# Allegro board DVM.brd
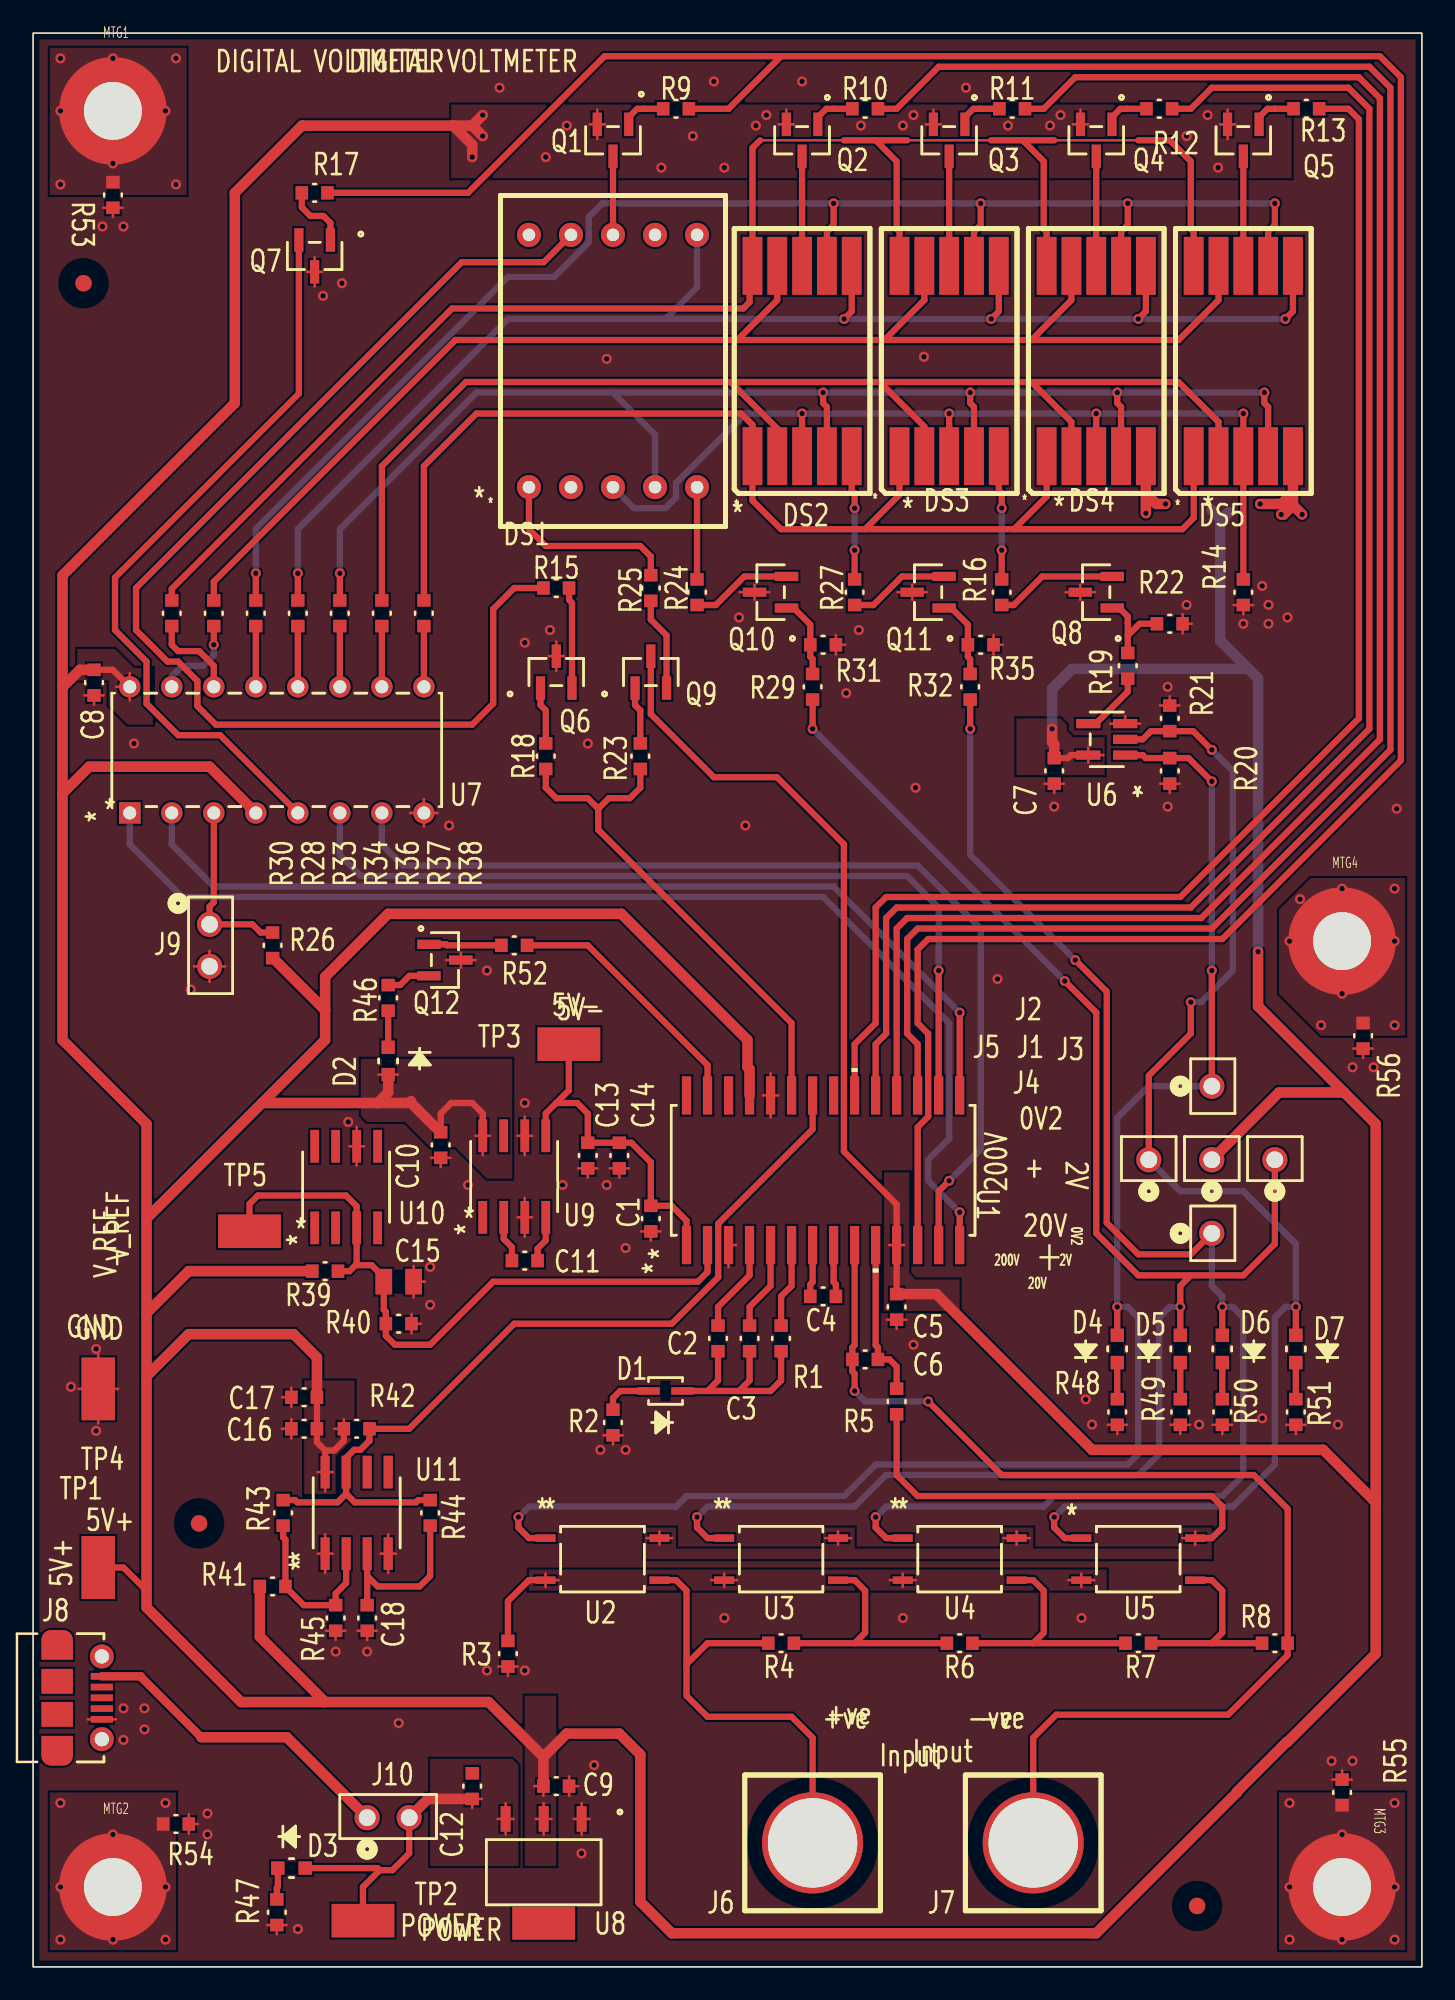
[diagram p0: board, top side]
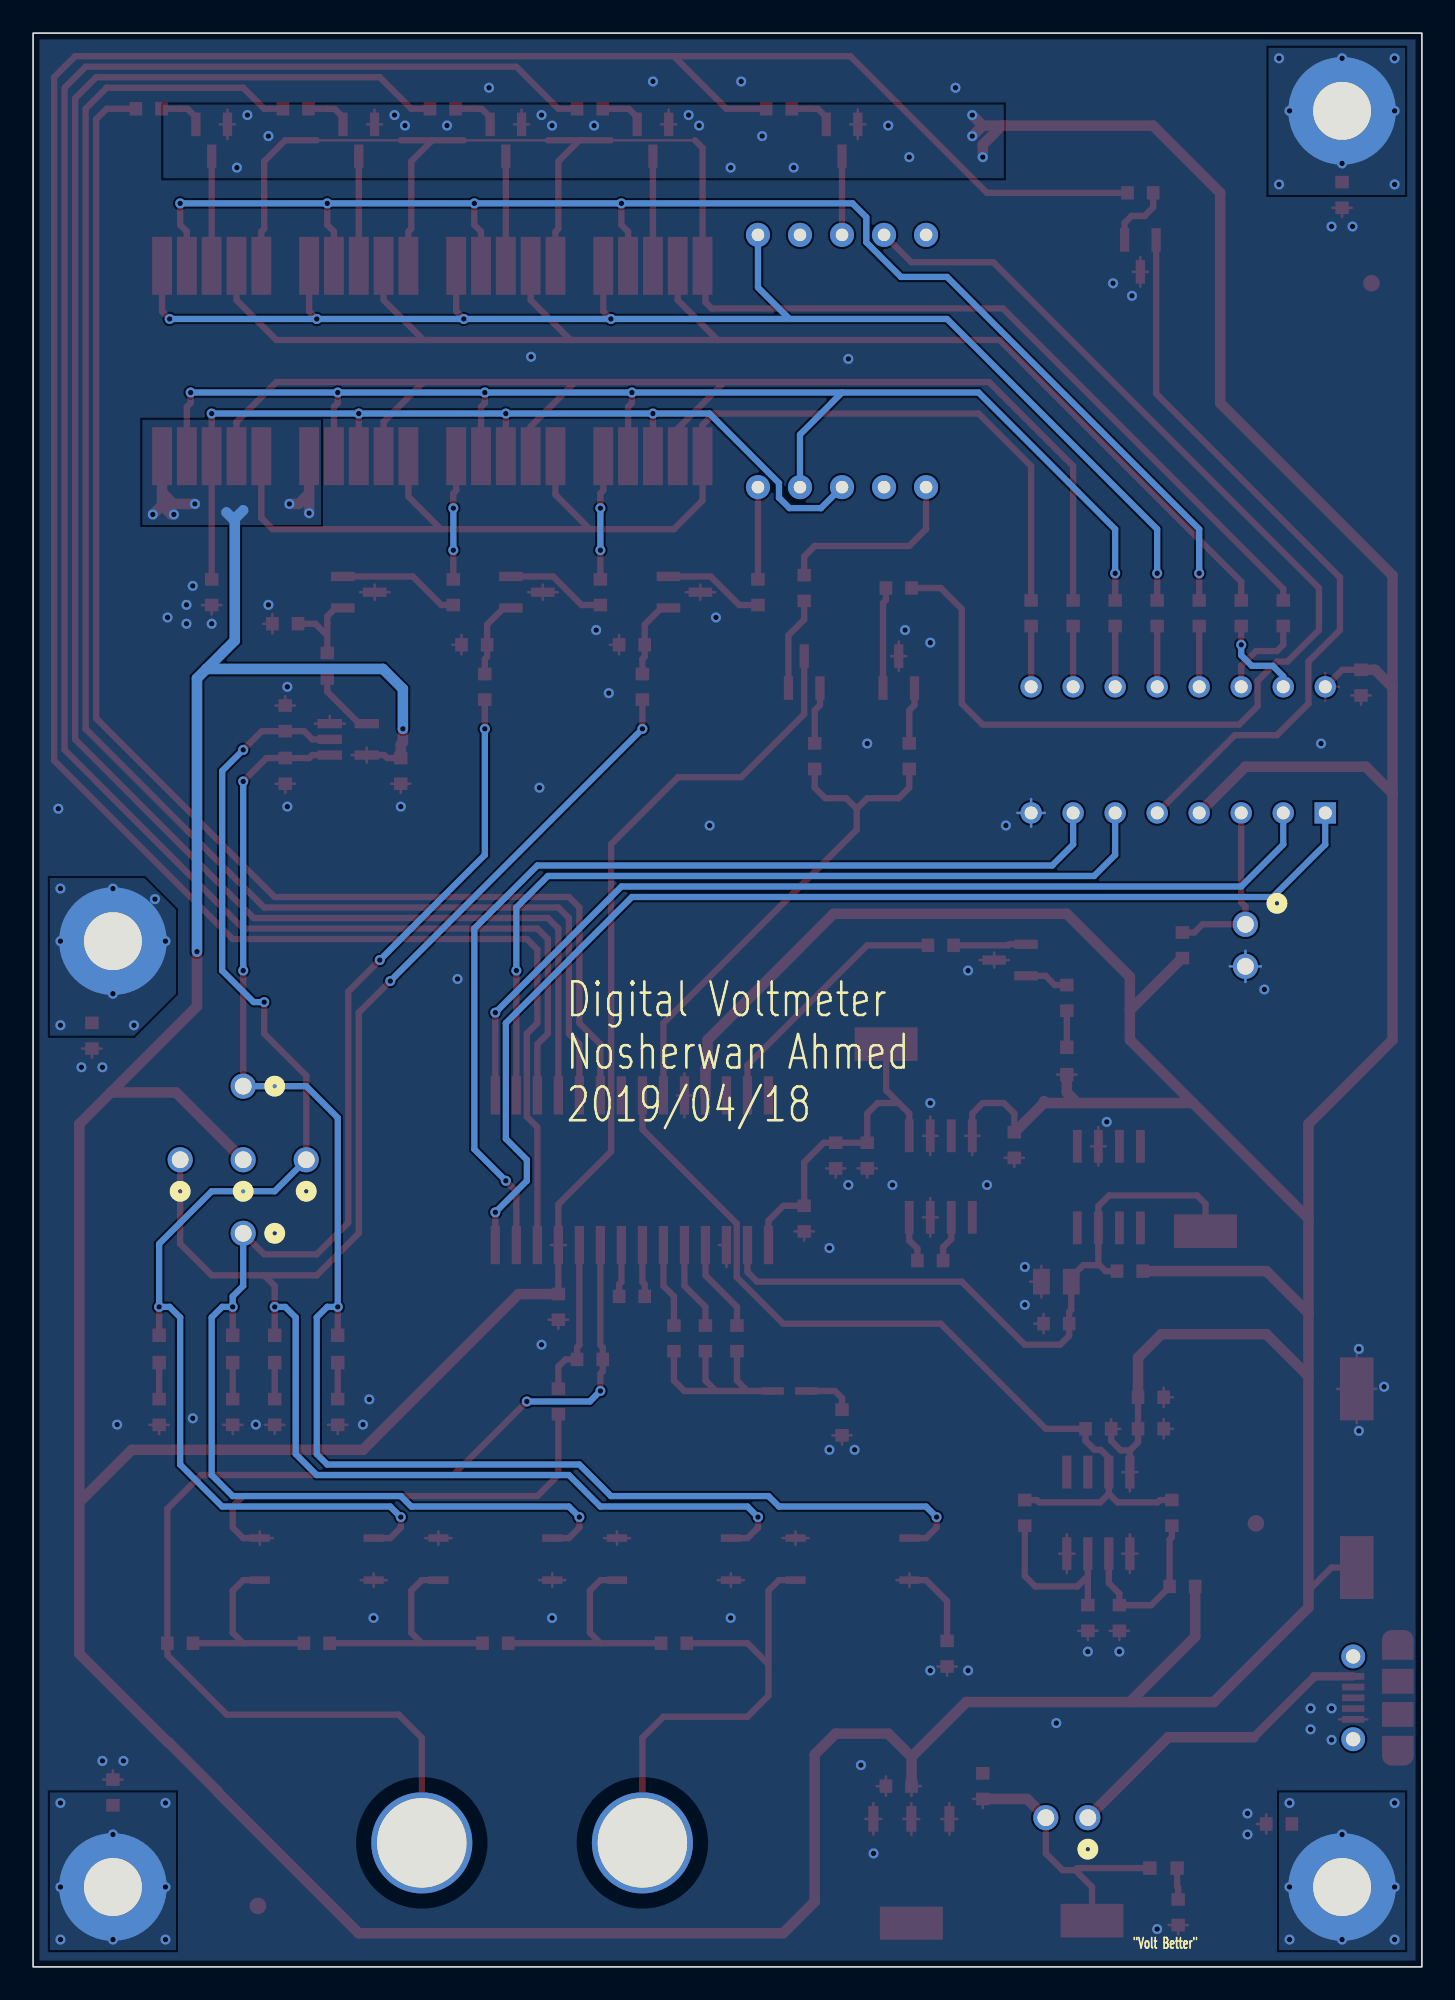
[diagram p1: board, bottom side, seen from below]

Outline 83.95 x 116.84 mm; copper layers: TOP, BOTTOM. Coordinates in mm from the lower left corner of the outline.
Outline path: rectangle 0,0 83.95,116.84

## Placement (name value [footprint] x y rotation side)
C1  10uF  [DVM_RC0603N_R0603]  37.34 45.21 270 top
C2  0.47uF  [DVM_RC0603N_R0603]  41.4 37.97 90 top
C3  1uF  [DVM_RC0603N_R0603]  43.31 37.97 90 top
C4  1uF  [DVM_RC0603N_R0603]  47.75 40.51 180 top
C5  10uF  [DVM_RC0603N_R0603]  52.2 39.88 270 top
C6  0.1uF  [DVM_RC0603N_R0603]  50.29 36.7 180 top
C7  10uF  [DVM_RC0603N_R0603]  61.72 72.26 270 top
C8  10uF  [DVM_RC0603N_R0603]  3.68 77.6 270 top
C9  10uF  [DVM_RC0603N_R0603]  31.62 10.92 0 top
C10  0.1uF  [DVM_RC0603N_R0603]  24.64 49.66 270 top
C11  10uF  [DVM_RC0603N_R0603]  29.72 42.67 0 top
C12  10uF  [DVM_RC0603N_R0603]  26.54 10.92 90 top
C13  0.1uF  [DVM_RC0603N_R0603]  33.53 49.02 90 top
C14  10uF  [DVM_RC0603N_R0603]  35.43 49.02 90 top
C15  4.7uF  [DVM_C0805C-M]  22.1 41.4 0 top
C16  10uF  [DVM_RC0603N_R0603]  16.38 32.51 180 top
C17  0.22uF  [DVM_RC0603N_R0603]  16.38 34.42 180 top
C18  510p  [DVM_RC0603N_R0603]  20.19 21.08 270 top
D1  DIODE  [DVM_SOD323_1N4148BWS]  38.23 34.8 180 top
D2  LED  [DVM_LED_ROHM_SML-D12U1WT86_LED]  21.46 54.74 270 top
D3  LED  [DVM_LED_ROHM_SML-D12U1WT86_LED]  15.62 5.97 0 top
D4  LED  [DVM_LED_ROHM_SML-D12U1WT86_LED]  65.53 37.34 90 top
D5  LED  [DVM_LED_ROHM_SML-D12U1WT86_LED]  69.34 37.34 90 top
D6  LED  [DVM_LED_ROHM_SML-D12U1WT86_LED]  71.88 37.34 90 top
D7  LED  [DVM_LED_ROHM_SML-D12U1WT86_LED]  76.33 37.34 90 top
DS1  LDF-A5616RI  [DVM_DIP_10_SS_OVERFLOW]  35.05 97.03 0 top
DS2  LDS-SMHTA304RISITR  [DVM_SOT_10_SS]  46.48 97.03 0 top
DS3  LDS-SMHTA304RISITR  [DVM_SOT_10_SS]  55.37 97.03 0 top
DS4  LDS-SMHTA304RISITR  [DVM_SOT_10_SS]  64.26 97.03 0 top
DS5  LDS-SMHTA304RISITR  [DVM_SOT_10_SS]  73.15 97.03 0 top
J1  HEADER 1  [DVM_CON1_1X1_TU_TSW_H1]  71.25 48.77 0 top
J2  HEADER 1  [DVM_CON1_1X1_TU_TSW_H1]  71.25 53.21 270 top
J3  HEADER 1  [DVM_CON1_1X1_TU_TSW_H1]  75.06 48.77 0 top
J4  HEADER 1  [DVM_CON1_1X1_TU_TSW_H1]  71.25 44.32 270 top
J5  HEADER 1  [DVM_CON1_1X1_TU_TSW_H1]  67.44 48.77 0 top
J6  CON1  [DVM_BANANA_INPUT]  47.12 7.49 0 top
J7  CON1  [DVM_BANANA_INPUT]  60.45 7.49 0 top
J8  1050170001  [DVM_CON00679_5_USB]  1.65 16.26 270 top
J9  HEADER 2  [DVM_CON2_1X2_TU_TSW_H2]  10.67 61.72 270 top
J10  HEADER 2  [DVM_CON2_1X2_TU_TSW_H2]  21.46 9.02 0 top
MTG1  M3  [M3_KAI]  4.83 112.14 0 top
MTG2  M3  [M3_KAI]  4.83 4.83 0 top
MTG3  M3  [M3_KAI]  79.12 4.83 0 top
MTG4  M3  [M3_KAI]  79.12 61.98 0 top
NOREF  -  [unnamed]  10.03 26.8 0 top
NOREF#2  -  [unnamed]  70.36 3.68 0 top
NOREF#3  -  [unnamed]  3.05 101.73 0 top
Q1  NPN BCE  [DVM_SOT-23_DNBT8105]  35.05 110.36 180 top
Q2  NPN BCE  [DVM_SOT-23_DNBT8105]  46.48 110.36 180 top
Q3  NPN BCE  [DVM_SOT-23_DNBT8105]  55.37 110.36 180 top
Q4  NPN BCE  [DVM_SOT-23_DNBT8105]  64.26 110.36 180 top
Q5  NPN BCE  [DVM_SOT-23_DNBT8105]  73.15 110.36 180 top
Q6  NPN BCE  [DVM_SOT-23_DNBT8105]  31.62 78.23 0 top
Q7  NPN BCE  [DVM_SOT-23_DNBT8105]  17.02 103.38 180 top
Q8  NPN BCE  [DVM_SOT-23_DNBT8105]  64.26 83.06 90 top
Q9  PNP BCE  [DVM_SOT-23_DNBT8105]  37.34 78.23 0 top
Q10  NPN BCE  [DVM_SOT-23_DNBT8105]  44.58 83.06 90 top
Q11  NPN BCE  [DVM_SOT-23_DNBT8105]  54.1 83.06 90 top
Q12  NPN BCE  [DVM_SOT-23_DNBT8105]  24.89 60.83 270 top
R1  10k  [DVM_RC0603N_R0603]  45.21 37.97 90 top
R2  100k  [DVM_RC0603N_R0603]  35.05 32.89 270 top
R3  390  [DVM_RC0603N_R0603]  28.7 18.92 270 top
R4  1.8M  [DVM_RC0603N_R0603]  45.21 19.56 0 top
R5  100k  [DVM_RC0603N_R0603]  52.2 34.16 90 top
R6  180k  [DVM_RC0603N_R0603]  56.01 19.56 0 top
R7  18k  [DVM_RC0603N_R0603]  66.8 19.56 0 top
R8  2k  [DVM_RC0603N_R0603]  75.06 19.56 0 top
R9  2.49k  [DVM_RC0603N_R0603]  38.86 112.27 180 top
R10  1.5k  [DVM_RC0603N_R0603]  50.29 112.27 180 top
R11  1.5k  [DVM_RC0603N_R0603]  59.18 112.27 180 top
R12  1.5k  [DVM_RC0603N_R0603]  68.07 112.27 180 top
R13  1.5k  [DVM_RC0603N_R0603]  76.96 112.27 180 top
R14  150  [DVM_RC0603N_R0603]  73.15 83.06 270 top
R15  150  [DVM_RC0603N_R0603]  31.62 83.31 180 top
R16  150  [DVM_RC0603N_R0603]  58.55 83.06 270 top
R17  47k  [DVM_RC0603N_R0603]  17.02 107.19 180 top
R18  4.7k  [DVM_RC0603N_R0603]  30.99 73.15 90 top
R19  27k  [DVM_RC0603N_R0603]  66.17 78.61 90 top
R20  10k  [DVM_RC0603N_R0603]  68.71 72.26 270 top
R21  10k  [DVM_RC0603N_R0603]  68.71 75.44 90 top
R22  10k  [DVM_RC0603N_R0603]  68.71 81.15 0 top
R23  4.7k  [DVM_RC0603N_R0603]  36.7 73.15 90 top
R24  150  [DVM_RC0603N_R0603]  40.13 83.06 270 top
R25  150  [DVM_RC0603N_R0603]  37.34 83.31 90 top
R26  10k  [DVM_RC0603N_R0603]  14.48 61.72 90 top
R27  150  [DVM_RC0603N_R0603]  49.66 83.06 270 top
R28  150  [DVM_RC0603N_R0603]  10.92 81.79 90 top
R29  27k  [DVM_RC0603N_R0603]  47.12 77.34 90 top
R30  150  [DVM_RC0603N_R0603]  8.38 81.79 90 top
R31  10k  [DVM_RC0603N_R0603]  47.75 79.88 0 top
R32  27k  [DVM_RC0603N_R0603]  56.64 77.34 90 top
R33  150  [DVM_RC0603N_R0603]  13.46 81.79 90 top
R34  150  [DVM_RC0603N_R0603]  16 81.79 90 top
R35  10k  [DVM_RC0603N_R0603]  57.28 79.88 0 top
R36  150  [DVM_RC0603N_R0603]  18.54 81.79 90 top
R37  150  [DVM_RC0603N_R0603]  21.08 81.79 90 top
R38  150  [DVM_RC0603N_R0603]  23.62 81.79 90 top
R39  6.8k  [DVM_RC0603N_R0603]  17.65 42.04 0 top
R40  10k  [DVM_RC0603N_R0603]  22.1 38.86 180 top
R41  16k  [DVM_RC0603N_R0603]  14.48 22.99 0 top
R42  1k  [DVM_RC0603N_R0603]  19.56 32.51 0 top
R43  56k  [DVM_RC0603N_R0603]  15.11 27.43 90 top
R44  30k  [DVM_RC0603N_R0603]  24 27.43 270 top
R45  16k  [DVM_RC0603N_R0603]  18.29 21.08 270 top
R46  140  [DVM_RC0603N_R0603]  21.46 58.55 90 top
R47  140  [DVM_RC0603N_R0603]  14.73 3.3 270 top
R48  140  [DVM_RC0603N_R0603]  65.53 33.53 270 top
R49  140  [DVM_RC0603N_R0603]  69.34 33.53 270 top
R50  140  [DVM_RC0603N_R0603]  71.88 33.53 270 top
R51  140  [DVM_RC0603N_R0603]  76.33 33.53 270 top
R52  39k  [DVM_RC0603N_R0603]  29.08 61.72 180 top
R53  0  [DVM_RC0603N_R0603]  4.83 107.06 270 top
R54  0  [DVM_RC0603N_R0603]  8.64 8.64 0 top
R55  0  [DVM_RC0603N_R0603]  79.12 10.54 90 top
R56  0  [DVM_RC0603N_R0603]  80.39 56.26 270 top
TP1  5V+  [DVM_TP380X203_TP]  3.94 24.13 90 top
TP2  Power_In  [DVM_TP380X203_TP]  19.94 2.79 0 top
TP3  5V-  [DVM_TP380X203_TP]  32.38 55.75 0 top
TP4  GND  [DVM_TP380X203_TP]  3.94 34.92 90 top
TP5  V_REF_1V2  [DVM_TP380X203_TP]  13.08 44.45 0 top
U1  TLC7135  [DVM_DW28_TLC7135]  47.75 48.13 90 top
U2  TLP175A  [DVM_4PINSO6_TLP175A]  34.42 24.64 0 top
U3  TLP175A  [DVM_4PINSO6_TLP175A]  45.21 24.64 0 top
U4  TLP175A  [DVM_4PINSO6_TLP175A]  56.01 24.64 0 top
U5  TLP175A  [DVM_4PINSO6_TLP175A]  66.8 24.64 0 top
U6  SN74LVC1G32DBVR  [DVM_DBV5_SN74]  64.9 74.17 180 top
U7  SN7447  [DVM_N16_SN7447AN]  5.84 69.72 90 top
U8  NCP1117ST50T3G  [DVM_SOT223-3_NCP1117]  30.86 5.71 180 top
U9  MAX1044CSA  [DVM_21-0041B_8_MAX1044]  29.08 47.75 90 top
U10  MAX8069ESA+  [DVM_21-0041B_8_MAX8069]  18.92 47.12 90 top
U11  LM311  [DVM_D8_LM311]  19.56 27.43 90 top

## Library data of the parts
C1-C18 = C
D1 = DIODE
D2-D7 = LED
DS1 = LDF-A5616RI
DS2-DS5 = LDS-SMHTA304RISITR
J1-J5 = HEADER 1
J6 J7 = CON1
J8 = 1050170001_0
J9 J10 = HEADER 2
MTG1-MTG4 = Mounting_Hole
Q1-Q8 Q10-Q12 = NPN BCE
Q9 = PNP BCE
R1-R56 = R
TP1-TP5 = TEST POINT
U1 = TLC7135CDW_1
U2-U5 = TLP175A_0
U6 = SN74LVC1G32DBVR
U7 = SN7447AN
U8 = NCP1117ST50T3G_2
U9 = MAX1044CSA
U10 = MAX8069ESA
U11 = LM311

## Footprints (pads in the part's own frame, mm; a bottom-side part is the same pattern mirrored in y, then rotated)
DVM_4PINSO6_TLP175A
  rect 1.219x0.457 smd: 1(-3.442,1.27) 2(-3.442,-1.27) 3(3.442,-1.27) 4(3.442,1.27)
DVM_21-0041B_8_MAX1044
  rect 1.981x0.533 smd: 1(-2.464,1.905) 2(-2.464,0.635) 3(-2.464,-0.635) 4(-2.464,-1.905) 5(2.464,-1.905) 6(2.464,-0.635) 7(2.464,0.635) 8(2.464,1.905)
DVM_21-0041B_8_MAX8069
  rect 1.981x0.533 smd: 1(-2.464,1.905) 2(-2.464,0.635) 3(-2.464,-0.635) 4(-2.464,-1.905) 5(2.464,-1.905) 6(2.464,-0.635) 7(2.464,0.635) 8(2.464,1.905)
DVM_BANANA_INPUT
  round 6.11 hole 5.41: 1(0,0)
DVM_C0805C-M
  rect 1.016x1.549 smd: 1(-0.902,0) 2(0.902,0)
DVM_CON1_1X1_TU_TSW_H1
  round 1.524 hole 1.016: 1(0,0)
DVM_CON2_1X2_TU_TSW_H2
  round 1.524 hole 1.016: 1(-1.27,0) 2(1.27,0)
DVM_CON00679_5_USB
  rect 0.406x1.346 smd: 1(-1.301,2.504) 2(-0.652,2.504) 3(-0.002,2.504) 4(0.648,2.504) 5(1.298,2.504)
  round 1.448 hole 0.864: 6(-2.502,2.504) 7(2.498,2.504)
  rect 1.499x1.905 smd: 8(-1.002,-0.196) 9(0.998,-0.196)
  oval 1.194x1.905 smd: 10(-3.502,-0.196) 11(3.498,-0.196)
  rect 1.2x1.905 smd: 12(-2.902,-0.196) 13(2.898,-0.196)
DVM_D8_LM311
  rect 1.981x0.559 smd: 1(-2.464,1.905) 2(-2.464,0.635) 3(-2.464,-0.635) 4(-2.464,-1.905) 5(2.464,-1.905) 6(2.464,-0.635) 7(2.464,0.635) 8(2.464,1.905)
DVM_DBV5_SN74
  rect 1.473x0.559 smd: 1(-1.118,0.95) 2(-1.118,0) 3(-1.118,-0.95) 4(1.118,-0.95) 5(1.118,0.95)
DVM_DIP_10_SS_OVERFLOW
  round 1.46 hole 0.76: 1(-5.08,-7.62) 2(-2.54,-7.62) 3(0,-7.62) 4(2.54,-7.62) 5(5.08,-7.62) 6(5.08,7.62) 7(2.54,7.62) 8(0,7.62) 9(-2.54,7.62) 10(-5.08,7.62)
DVM_DW28_TLC7135
  rect 2.311x0.559 smd: 1(-4.521,8.255) 2(-4.521,6.985) 3(-4.521,5.715) 4(-4.521,4.445) 5(-4.521,3.175) 6(-4.521,1.905) 7(-4.521,0.635) 8(-4.521,-0.635) 9(-4.521,-1.905) 10(-4.521,-3.175) 11(-4.521,-4.445) 12(-4.521,-5.715) 13(-4.521,-6.985) 14(-4.521,-8.255) 15(4.521,-8.255) 16(4.521,-6.985) 17(4.521,-5.715) 18(4.521,-4.445) 19(4.521,-3.175) 20(4.521,-1.905) 21(4.521,-0.635) 22(4.521,0.635) 23(4.521,1.905) 24(4.521,3.175) 25(4.521,4.445) 26(4.521,5.715) 27(4.521,6.985) 28(4.521,8.255)
DVM_LED_ROHM_SML-D12U1WT86_LED
  rect 0.813x0.813 smd: 1(-0.826,0) 2(0.826,0)
DVM_N16_SN7447AN
  rect 1.295x1.295 hole 0.787: 1(0,0)
  round 1.295 hole 0.787: 2(0,-2.54) 3(0,-5.08) 4(0,-7.62) 5(0,-10.16) 6(0,-12.7) 7(0,-15.24) 8(0,-17.78) 9(7.62,-17.78) 10(7.62,-15.24) 11(7.62,-12.7) 12(7.62,-10.16) 13(7.62,-7.62) 14(7.62,-5.08) 15(7.62,-2.54) 16(7.62,0)
DVM_RC0603N_R0603
  rect 0.762x0.813 smd: 1(-0.775,0) 2(0.775,0)
DVM_SOD323_1N4148BWS
  rect 1.359x0.457 smd: 1(-1.022,0) 2(1.022,0)
DVM_SOT223-3_NCP1117
  rect 0.61x1.549 smd: 1(-2.299,-3.226) 2(0,-3.226) 3(2.299,-3.226)
  rect 3.8x2 smd: 4(0,3.073)
DVM_SOT-23_DNBT8105
  rect 0.559x1.422 smd: 1(-0.953,-0.965) 2(0.953,-0.965) 3(0,0.965)
DVM_SOT_10_SS
  rect 1.2x3.5 smd: 1(-3,-5.75) 2(-1.5,-5.75) 3(0,-5.75) 4(1.5,-5.75) 5(3,-5.75) 6(3,5.75) 7(1.5,5.75) 8(0,5.75) 9(-1.5,5.75) 10(-3,5.75)
DVM_TP380X203_TP
  rect 3.8x2.03 smd: 1(0,0)
M3_KAI
  round 6.5 hole 3.5: 1(0,0)
unnamed
  round 1 smd: (0,0)

## Nets
5V+: C5.1 C7.1 C8.1 C9.1 C10.1 C16.1 C17.1 D2.2(ANODE) DS4.5(CATHODE_DP) DS5.5(CATHODE_DP) J1.1 Q1.2(C) Q2.2(C) Q3.2(C) Q4.2(C) Q5.2(C) Q9.3(E) R26.1 R39.1 R41.1 R42.1 TP1.1 U1.11(VCC+) U1.25(RUN/*HOLD) U6.5(VCC) U7.4(*BI/*RBO) U7.16(VCC) U8.2(OUT) U9.8(V+) U11.8(V+)
5V-: C1.1 C13.2 C14.2 TP3.1 U1.1(VCC?) U9.5(VOUT)
GND: C1.2 C5.2 C7.2 C8.2 C9.2 C10.2 C12.2 C13.1 C14.1 C15.2 C16.2 C17.2 C18.2 J8.5 J9.2 Q6.3(E) Q7.3(E) Q8.3(E) Q10.3(E) Q11.3(E) Q12.3(E) R2.2 R3.2 R14.2 R20.2 R21.2 R22.2 R31.2 R35.2 R40.1 R45.2 R47.2 R48.2 R49.2 R50.2 R51.2 R53.2 R54.2 R55.2 R56.2 TP4.1 U1.3(ANLG COMMON) U1.24(DGTLGND) U6.3(GND) U7.8(GND) U8.1(GND) U9.3(GND) U9.6(LV) U10.6(ANODE) U11.1(GND) U11.4(V-)
VIN_POS: J6.1 R4.1 U2.3(DRAIN_2)
B1: U1.13(B1) U7.7(A)
B2: U1.14(B2) U7.1(B)
B4: U1.15(B4) U7.2(C)
B8: U1.16(B8) U7.6(D)
COMMON_CATHODE: R3.1 U2.2(CATHODE) U3.2(CATHODE) U4.2(CATHODE) U5.2(CATHODE)
D1: R13.1 U1.20(D1)
D2: R12.1 U1.19(D2)
D3: R11.1 U1.18(D3)
D4: R10.1 U1.17(D4)
D5: R9.1 R17.1 U1.12(D5)
MODE_0V2: D4.2(ANODE) J2.1 R20.1 U2.1(ANODE) U6.1(A)
MODE_2V: D5.2(ANODE) J3.1 R29.1 U3.1(ANODE)
MODE_20V: D6.2(ANODE) J4.1 R32.1 U4.1(ANODE)
MODE_200V: D7.2(ANODE) J5.1 R21.1 U5.1(ANODE) U6.2(B)
OSC_120KHZ: R42.2 R43.2 R44.1 U1.22(CLK) U11.7(OUT)
OVER_RNG: R52.1 U1.27(OVERRANGE)
POL: R18.1 R23.1 U1.23(POLARITY)
POWER_IN: C12.1 D3.2(ANODE) J10.2 TP2.1 U8.3(IN)
SS_A: DS2.7(CATHODE_A) DS3.7(CATHODE_A) DS4.7(CATHODE_A) DS5.7(CATHODE_A) R33.2
SS_B: DS1.6(CATHODE_B) DS2.6(CATHODE_B) DS3.6(CATHODE_B) DS4.6(CATHODE_B) DS5.6(CATHODE_B) R34.2
SS_C: DS1.4(CATHODE_C) DS2.4(CATHODE_C) DS3.4(CATHODE_C) DS4.4(CATHODE_C) DS5.4(CATHODE_C) R36.2
SS_D: DS2.2(CATHODE_D) DS3.2(CATHODE_D) DS4.2(CATHODE_D) DS5.2(CATHODE_D) R37.2
SS_DP3: DS3.5(CATHODE_DP) R16.1
SS_DP4: DS2.5(CATHODE_DP) R27.1
SS_DP5: DS1.5(CATHODE_DP) R24.1
SS_E: DS2.1(CATHODE_E) DS3.1(CATHODE_E) DS4.1(CATHODE_E) DS5.1(CATHODE_E) R38.2
SS_F: DS2.9(CATHODE_F) DS3.9(CATHODE_F) DS4.9(CATHODE_F) DS5.9(CATHODE_F) R28.2
SS_G: DS2.10(CATHODE_G) DS3.10(CATHODE_G) DS4.10(CATHODE_G) DS5.10(CATHODE_G) R30.2
SS_NEG: DS1.1(CATHODE_MINUS) R25.2
SS_POS: DS1.9(CATHODE_PLUS) R15.2
V_NEG: C6.2 J7.1 R8.2 U1.9(IN?)
V_POS: C6.1 R5.2 U1.10(IN+)
V_REF_1V2: C15.1 R39.2 R40.2 TP5.1 U1.2(REF) U10.3(CATHODE)
N00563: C11.1 U9.2(CAP+)
N00567: C11.2 U9.4(CAP-)
N01528: R41.2 R43.1 R45.1 U11.2(+IN)
N01588: C18.1 R44.2 U11.3(-IN)
N03523: R4.2 R6.1 U3.3(DRAIN_2)
N03533: R6.2 R7.1 U4.3(DRAIN_2)
N03577: R7.2 R8.1 U5.3(DRAIN_2)
N04032: R5.1 U2.4(DRAIN_1) U3.4(DRAIN_1) U4.4(DRAIN_1) U5.4(DRAIN_1)
N07546: D1.2(A) R2.1
N07705: C2.2 U1.4(INT OUT)
N07717: C3.2 U1.5(AUTO ZERO)
N07775: C2.1 C3.1 D1.1(K) R1.1
N08029: R1.2 U1.6(BUFF OUT)
N08054: C4.2 U1.7(CREF?)
N08061: C4.1 U1.8(CREF+)
N14805: DS1.3(ANODE_COMM_1) DS2.3(ANODE_COMM_1) DS3.3(ANODE_COMM_1) DS4.3(ANODE_COMM_1) DS5.3(ANODE_COMM_1) R14.1
N18989: J9.1 R26.2 U7.3(*LT)
N19111: Q7.2(C) U7.5(*RBI)
N19152: R28.1 U7.15(F)
N19173: R30.1 U7.14(G)
N19179: R33.1 U7.13(A_1)
N19194: R34.1 U7.12(B_1)
N19209: R36.1 U7.11(C_1)
N19228: R37.1 U7.10(D_1)
N19243: R38.1 U7.9(E)
N19743: DS1.8(ANODE_COMM_2) Q1.3(E)
N19818: DS2.8(ANODE_COMM_2) Q2.3(E)
N19836: DS3.8(ANODE_COMM_2) Q3.3(E)
N19853: DS4.8(ANODE_COMM_2) Q4.3(E)
N19889: DS5.8(ANODE_COMM_2) Q5.3(E)
N20631: Q8.1(B) R19.2 R22.1
N21108: Q10.1(B) R29.2 R31.1
N21509: Q11.1(B) R32.2 R35.1
N23587: Q6.1(B) R18.2
N23591: Q9.1(B) R23.2
N23726: Q9.2(C) R25.1
N23733: Q6.2(C) R15.1
N24793: D3.1(CATHODE) R47.1
N24801: D4.1(CATHODE) R48.1
N24805: D5.1(CATHODE) R49.1
N24809: D6.1(CATHODE) R50.1
N24813: D7.1(CATHODE) R51.1
N25196: J8.1 J10.1
N37644: Q7.1(B) R17.2
N38125: Q5.1(B) R13.2
N38143: Q4.1(B) R12.2
N38147: Q3.1(B) R11.2
N38167: Q2.1(B) R10.2
N38171: Q1.1(B) R9.2
N38464: Q10.2(C) R24.2
N38604: Q11.2(C) R27.2
N40574: Q8.2(C) R16.2
N40763: R19.1 U6.4(Y)
N40918: Q12.1(B) R52.2
N40926: Q12.2(C) R46.2
N40930: D2.1(CATHODE) R46.1
N2730560: MTG1.1 R53.1
N2730572: MTG2.1 R54.1
N2730576: MTG3.1 R55.1
N2730580: MTG4.1 R56.1

Pads without a net: DS1 2 7 10; J8 2 3 4 6 7 8 9 10 11 12 13; U1 21 26 28; U8 4; U9 1 7; U10 1 2 4 5 7 8; U11 5 6

## Via types
v1: diameter 0.61, hole 0.33, TOP to BOTTOM, 177 vias

## Routing (per net, layer and track width the routed paths; a pad name or vN(x,y) marks a point on that pad's centre or on a via; arc(x,y) is an arc through that point)
5V+: length 570.7
  TOP w0.152: Q1.2 34.1,112.22 ; Q1.2 34.56,111.33 ; Q1.2 33.64,111.33 ; Q1.2 34.1,110.44 ; 72.2,110.44 Q5.2 ; Q5.2 71.74,111.33 ; Q5.2 72.2,112.22 ; Q5.2 72.66,111.33 ; 5.84,77.34 5.84,78.17 ; 5.84,77.34 5.02,77.34 ; 5.84,77.34 5.84,76.52 ; 52.65,43.61 U1.11 51.74,43.61 ; Q2.2 45.99,111.33 ; Q2.2 45.07,111.33 ; Q2.2 45.53,112.22 ; U6.5 64.69,73.22 ; U6.5 63.78,72.76 ; U6.5 63.78,73.68 ; 30.38,8.94 U8.2 ; U8.2 30.86,9.89 ; U8.2 30.86,7.99 ; U8.2 31.34,8.94 ; Q4.2 63.31,112.22 ; Q4.2 62.85,111.33 ; Q4.2 63.77,111.33 ; 18.22,32.51 R42.1 18.78,33.1 ; 26.73,50.22 U9.8 ; U9.8 27.62,50.22 ; U9.8 27.18,49.05 ; Q3.2 54.88,111.33 ; Q3.2 53.96,111.33 ; Q3.2 54.42,112.22 ; U11.8 18.11,29.9 ; U11.8 17.65,28.73 ; U11.8 17.2,29.9 ; 30.29,10.92 C9.1 30.85,10.34 ; 22.05,53.91 D2.2 20.88,53.91
  TOP w0.381: U9.8 27.18,51.56 26.54,52.2 25.27,52.2 24.64,51.56 C10.1 ; 17.65,31.2 U11.8 ; 17.65,31.2 18.2,31.2 18.78,31.79 R42.1 ; 17.65,31.2 17.16,31.7 C16.1 C17.1 ; C8.1 4.81,78.37 5.84,77.34 ; U6.5 62.73,73.22 62.54,73.04 C7.1 ; C5.1 U1.11 52.2,46.08 49.01,49.26 49.01,67.83 44.96,71.88 41.15,71.88 37.34,75.69 Q9.3 ; 6.86,22.73 5.46,24.13 TP1.1
  TOP w0.635: 79.25,52.83 81.15,50.93 81.15,28.07 ; 79.25,52.83 74.04,58.04 v1(74.04,61.34) ; 79.25,52.83 75.31,52.83 J1.1 ; C17.1 17.16,36.82 15.75,38.23 9.4,38.23 6.86,35.69 ; 30.85,12.69 C9.1 ; 30.85,12.69 27.53,16 17.65,16 ; 30.85,12.69 32.26,14.1 35.43,14.1 36.7,12.83 36.7,3.94 38.61,2.03 64.26,2.03 72.78,10.55 72.78,10.6 75.76,13.58 75.81,13.58 81.15,18.92 81.15,28.07 ; DS4.5 67.26,89.03 ; 67.26,89.03 67.9,88.39 v1(68.45,88.39) ; 67.26,89.03 v1(67.26,87.84) ; 76.15,89.08 75.46,88.39 v1(74.17,88.39) ; 76.15,89.08 76.15,88.31 ; 76.15,89.08 DS5.5 ; 26.54,111.25 v1(27.18,110.62) ; 26.54,111.25 25.39,111.25 ; 26.54,111.25 v1(27.18,111.89) ; 17.65,16 12.57,16 6.86,21.72 6.86,35.69 ; 17.65,16 13.7,19.95 R41.1 ; 25.39,111.25 26.54,110.1 v1(26.54,109.35) ; 25.39,111.25 16.26,111.25 12.19,107.19 12.19,94.49 1.78,84.07 1.78,77.32 ; 76.15,88.31 75.6,87.76 v1(75.44,87.76) ; 76.15,88.31 v1(76.71,87.76) ; 22.85,52.31 22.85,52.2 ; 22.85,52.2 20.83,52.2 ; 22.85,52.2 24.61,50.43 C10.1 ; 1.78,70.91 1.78,56.01 6.86,50.93 6.86,45.21 ; 1.78,70.91 1.78,77.32 ; 1.78,70.91 3.39,72.52 10.67,72.52 U7.4 ; 6.86,35.69 6.86,39.5 ; 13.84,52.2 20.83,52.2 ; 13.84,52.2 17.65,56.01 17.65,57.8 ; 13.84,52.2 6.86,45.21 ; 20.83,52.2 21.46,52.83 D2.2 ; 1.78,77.32 2.83,78.37 C8.1 ; 6.86,45.21 6.86,39.5 ; 6.86,39.5 9.4,42.04 R39.1 ; R26.1 14.5,60.95 17.65,57.8 ; 81.15,28.07 77.98,31.24 64.01,31.24 54.6,40.65 C5.1 ; 17.65,57.8 17.65,59.82 21.46,63.63 35.56,63.63 43.18,56.01 43.18,54.38 43.31,54.25 U1.25 ; v1(61.59,74.8) 61.59,73.99 61.72,73.86 C7.1
  BOTTOM w0.635: 73.47,78.42 74.04,77.85 v1(74.04,61.34) ; 73.47,78.42 71.75,80.14 71.75,87.38 ; 73.47,78.42 62.8,78.42 61.59,77.22 v1(61.59,74.8) ; 71.75,87.38 71.75,87.5 71.25,88.01 ; 71.75,87.38 72.26,87.88
  vias: v1(30.99,109.35) v1(32.26,111.25) v1(37.97,108.71) v1(39.88,110.62) v1(41.78,108.71) v1(43.69,111.25) v1(44.32,111.89) v1(50.04,111.25) v1(52.58,111.25) v1(53.21,111.89) v1(58.93,111.25) v1(61.47,111.25) v1(62.1,111.89) v1(69.72,110.62) v1(70.99,111.89) v1(71.63,108.71)
5V-: length 21
  TOP w0.381: 31.62,52.2 32.38,52.96 TP3.1 ; 31.62,52.2 32.89,52.2 33.53,51.56 C13.2 C14.2 36.16,49.8 37.34,48.62 C1.1 38.6,45.99 39.5,45.09 U1.1 ; 31.62,52.2 30.99,51.56 U9.5
GND: length 119.7
  TOP w0.152: 48.53,79.3 R31.2 ; R31.2 48.53,80.47 ; R31.2 49.09,79.88 ; 15.05,32.51 C16.2 ; C16.2 15.61,33.1 ; C16.2 15.61,31.93 ; R40.1 22.87,39.45 ; R40.1 23.43,38.86 ; R40.1 22.87,38.28 ; 75.74,32.75 R51.2 ; R51.2 76.33,32.19 ; R51.2 76.91,32.75 ; R21.2 68.71,76.77 ; R21.2 69.29,76.21 ; R21.2 68.12,76.21 ; 53.14,82.6 Q11.3 ; Q11.3 52.25,83.06 ; Q11.3 53.14,83.52 ; Q11.3 54.03,83.06 ; 69.48,80.57 R22.2 ; R22.2 70.04,81.15 ; R22.2 69.48,81.74 ; 3.1,76.82 C8.2 ; C8.2 4.27,76.82 ; C8.2 3.68,76.26 ; 5.01,14.96 J8.5 3.3,14.96 ; C1.2 37.92,44.44 ; C1.2 36.75,44.44 ; C1.2 37.34,43.88 ; 14.73,1.97 R47.2 ; R47.2 14.15,2.53 ; R47.2 15.32,2.53 ; 10.67,59.51 J9.2 ; J9.2 9.73,60.45 ; J9.2 10.67,61.39 ; J9.2 11.61,60.45 ; 20.19,19.75 C18.2 ; C18.2 20.78,20.31 ; C18.2 19.61,20.31 ; 79.81,55.49 R56.2 ; R56.2 80.98,55.49 ; R56.2 80.39,54.93 ; 31.62,78.31 Q6.3 ; Q6.3 32.08,79.2 ; Q6.3 31.62,80.09 ; Q6.3 31.17,79.2 ; 29.72,49.05 29.72,50.22 ; 29.72,50.22 30.16,50.22 ; 29.72,50.22 29.27,50.22 ; 29.72,50.22 29.72,51.38 ; 32.68,8.94 U8.1 ; U8.1 33.16,9.89 ; U8.1 33.16,7.99 ; U8.1 33.64,8.94 ; 68.71,70.93 R20.2 ; R20.2 68.12,71.49 ; R20.2 69.29,71.49 ; R14.2 73.74,82.28 ; R14.2 72.57,82.28 ; R14.2 73.15,81.72 ; 44.12,52.65 U1.24 ; U1.24 44.58,53.99 ; U1.24 44.58,51.32 ; U1.24 45.03,52.65 ; C17.2 15.61,35 ; C17.2 15.61,33.83 ; C17.2 15.05,34.42 ; 19.56,49.58 19.56,50.75 ; 19.56,49.58 19.56,48.41 ; 19.56,49.58 20,49.58 ; 19.56,49.58 19.11,49.58 ; 16.56,102.41 Q7.3 ; Q7.3 17.48,102.41 ; Q7.3 17.02,101.52 ; Q7.3 17.02,103.3 ; 21.46,23.8 U11.4 ; U11.4 21.46,26.14 ; U11.4 21.92,24.97 ; U11.4 21.01,24.97 ; 32.94,48.25 C13.1 ; C13.1 33.53,47.69 ; C13.1 34.11,48.25 ; 69.34,32.19 R49.2 ; R49.2 69.93,32.75 ; R49.2 68.76,32.75 ; 78.54,11.32 R55.2 ; R55.2 79.12,11.88 ; R55.2 79.71,11.32 ; 61.72,70.93 C7.2 ; C7.2 62.31,71.49 ; C7.2 61.14,71.49 ; 58.05,79.3 R35.2 ; R35.2 58.61,79.88 ; R35.2 58.05,80.47 ; 24.97,60.83 Q12.3 ; Q12.3 25.86,60.38 ; Q12.3 26.75,60.83 ; Q12.3 25.86,61.29 ; 23.62,68.9 U7.8 ; U7.8 22.8,69.72 ; U7.8 23.62,70.55 ; U7.8 24.45,69.72 ; 35.43,47.69 C14.1 ; C14.1 36.02,48.25 ; C14.1 34.85,48.25 ; 23,40.45 C15.2 ; C15.2 23.69,41.4 ; C15.2 23,42.36 ; 29.72,45.29 29.72,46.46 ; 29.72,45.29 29.72,44.12 ; 29.72,45.29 29.27,45.29 ; 29.72,45.29 30.16,45.29 ; 42.49,43.61 U1.3 42.04,42.28 ; 52.2,38.54 C5.2 ; C5.2 52.78,39.1 ; C5.2 51.61,39.1 ; 65.53,32.19 R48.2 ; R48.2 64.95,32.75 ; R48.2 66.12,32.75 ; 24.64,48.32 C10.2 ; C10.2 25.22,48.88 ; C10.2 24.05,48.88 ; 32.4,10.34 C9.2 ; C9.2 32.96,10.92 ; C9.2 32.4,11.51 ; R2.2 35.64,32.12 ; R2.2 34.47,32.12 ; R2.2 35.05,31.56 ; 71.88,32.19 R50.2 ; R50.2 72.47,32.75 ; R50.2 71.3,32.75 ; TP4.1 3.94,37 ; TP4.1 2.74,34.92 ; TP4.1 5.13,34.92 ; TP4.1 3.94,32.85 ; Q10.3 43.61,83.52 ; Q10.3 43.61,82.6 ; Q10.3 44.5,83.06 ; Q10.3 42.72,83.06 ; 9.41,8.05 R54.2 ; R54.2 9.97,8.64 ; R54.2 9.41,9.22 ; R3.2 29.29,18.15 ; R3.2 28.12,18.15 ; R3.2 28.7,17.59 ; U6.3 66.93,75.12 ; U6.3 66.01,75.58 ; U6.3 65.1,75.12 ; Q8.3 63.3,83.52 ; Q8.3 62.41,83.06 ; Q8.3 64.19,83.06 ; Q8.3 63.3,82.6 ; R45.2 18.87,20.31 ; R45.2 17.7,20.31 ; R45.2 18.29,19.75 ; U11.1 17.65,26.14 ; U11.1 17.2,24.97 ; U11.1 17.65,23.8 ; U11.1 18.11,24.97 ; 4.24,106.29 R53.2 ; R53.2 4.83,105.73 ; R53.2 5.41,106.29
  BOTTOM w0.152: 9.73,60.45 J9.2 ; J9.2 10.67,59.51 ; J9.2 11.61,60.45 ; J9.2 10.67,61.39 ; U7.8 24.45,69.72 ; U7.8 22.8,69.72 ; U7.8 23.62,70.55 ; U7.8 23.62,68.9
  vias: v1(2.29,35.05) v1(3.81,37.34) v1(3.81,32.38) v1(4.19,105.16) v1(5.46,105.16) v1(5.46,15.62) v1(5.46,13.72) v1(6.1,73.91) v1(6.73,15.62) v1(6.73,14.35) v1(9.53,59.05) v1(10.54,9.27) v1(10.54,8) v1(16,2.29) v1(17.53,100.97) v1(18.29,19.05) v1(18.67,101.73) v1(19.05,51.05) v1(20.19,19.05) v1(22.1,14.73) v1(24,42.29) v1(24,40.01) v1(25.15,68.96) v1(26.29,47.24) v1(27.43,60.2) v1(27.43,17.91) v1(28.19,113.54) v1(29.72,80.01) v1(29.72,52.2) v1(29.72,17.91) v1(31.24,80.77) v1(32,47.24) v1(33.15,6.86) v1(33.53,73.91) v1(33.91,12.19) v1(34.29,31.24) v1(34.67,97.16) v1(34.67,47.24) v1(35.81,43.43) v1(35.81,31.24) v1(41.15,113.92) v1(41.78,21.08) v1(42.67,81.53) v1(43.05,68.96) v1(46.48,113.92) v1(49.15,76.96) v1(49.91,80.77) v1(52.58,21.08) v1(53.21,37.59) v1(53.34,71.25) v1(53.85,97.28) v1(56.39,113.54) v1(58.29,59.69) v1(61.72,70.1) v1(63.37,21.08) v1(63.63,34.29) v1(64.01,32.77) v1(68.58,77.34) v1(68.58,70.1) v1(69.72,82.3) v1(70.48,32.77) v1(73.15,81.15) v1(74.3,83.44) v1(74.3,33.15) v1(74.68,82.3) v1(74.68,81.15) v1(75.82,81.53) v1(78.49,12.45) v1(78.87,32.77) v1(79.76,54.36) v1(79.76,12.45) v1(81.03,54.36) v1(82.42,69.98)
VIN_POS: length 28.7
  TOP w0.381: J6.1 47.12,13.84 45.85,15.11 40.77,15.11 39.5,16.38 39.5,18.29 ; U2.3 38.86,23.37 39.5,22.73 39.5,18.29 ; 39.5,18.29 40.77,19.56 R4.1
B1: length 60.4
  TOP w0.381: v1(55.37,47.5) 54.74,46.86 U1.13
  BOTTOM w0.381: v1(55.37,47.5) 57.28,49.4 57.28,62.74 53.47,66.55 22.35,66.55 21.08,67.82 U7.7
B2: length 70.6
  TOP w0.381: U1.14 v1(56.01,45.59)
  BOTTOM w0.381: U7.1 5.84,67.82 9.02,64.64 47.75,64.64 55.37,57.02 55.37,50.04 54.1,48.77 54.1,47.5 v1(56.01,45.59)
B4: length 58.7
  TOP w0.381: U1.15 v1(56.01,57.66)
  BOTTOM w0.381: v1(56.01,57.66) 48.39,65.28 10.92,65.28 8.38,67.82 8.38,69.72
B8: length 51.4
  TOP w0.381: U1.16 v1(54.74,60.2)
  BOTTOM w0.381: U7.6 18.54,67.18 19.81,65.91 52.83,65.91 54.74,64.01 v1(54.74,60.2)
COMMON_CATHODE: length 14
  TOP w0.152: U5.2 63.36,23.77 ; U5.2 62.57,23.37 ; U5.2 63.36,22.96 ; U5.2 64.15,23.37 ; 41.77,22.96 U3.2 ; U3.2 42.56,23.37 ; U3.2 41.77,23.77 ; U3.2 40.98,23.37 ; U2.2 31.76,23.37 ; U2.2 30.98,22.96 ; U2.2 30.98,23.77 ; U4.2 52.57,23.77 ; U4.2 52.57,22.96 ; U4.2 53.35,23.37 ; U4.2 51.78,23.37
  TOP w0.381: R3.1 28.7,22.1 29.97,23.37 U2.2
D1: length 84.7
  TOP w0.381: U1.20 49.66,55.75 50.93,57.02 50.93,64.01 51.56,64.64 69.34,64.64 80.14,75.44 80.14,111.63 79.5,112.27 R13.1
D2: length 95.4
  TOP w0.381: U1.19 50.93,55.75 51.56,56.39 51.56,63.37 52.2,64.01 69.98,64.01 80.77,74.8 80.77,112.27 79.5,113.54 71.25,113.54 69.98,112.27 R12.1
D3: length 105.5
  TOP w0.381: R11.1 61.09,112.27 62.99,114.17 80.14,114.17 81.41,112.9 81.41,74.17 70.61,63.37 52.83,63.37 52.2,62.74 U1.18
D4: length 116.2
  TOP w0.381: R10.1 52.2,112.27 54.74,114.81 80.77,114.81 82.04,113.54 82.04,73.53 71.25,62.74 53.47,62.74 52.83,62.1 52.83,56.39 53.47,55.75 U1.17
D5: length 169.3
  TOP w0.381: R9.1 42.04,112.27 45.21,115.44 ; 45.21,115.44 81.41,115.44 82.68,114.17 82.68,72.9 71.88,62.1 54.1,62.1 53.47,61.47 53.47,57.02 54.1,56.39 54.1,51.37 53.47,50.73 U1.12 ; 45.21,115.44 34.54,115.44 26.29,107.19 R17.1
MODE_0V2: length 95.3
  TOP w0.381: U2.1 29.97,25.91 29.34,26.54 v1(29.34,27.18) ; v1(65.53,39.88) D4.2 ; J2.1 v1(71.25,60.2) ; v1(71.25,71.63) 69.84,73.04 R20.1 67.25,73.04 67.07,73.22 U6.1
  BOTTOM w0.381: J2.1 67.44,53.21 65.53,51.31 v1(65.53,39.88) 66.17,39.88 66.8,39.24 66.8,30.99 66.17,30.35 50.93,30.35 49.02,28.45 39.5,28.45 38.86,27.81 29.97,27.81 v1(29.34,27.18) ; v1(71.25,71.63) v1(71.25,60.2)
MODE_2V: length 102.8
  TOP w0.381: U3.1 40.77,25.91 40.13,26.54 v1(40.13,27.18) ; v1(47.12,74.8) R29.1 ; 69.98,41.78 73.15,41.78 75.06,43.69 J3.1 ; 69.98,41.78 69.34,41.15 v1(69.34,39.88) D5.2 ; 69.98,41.78 66.8,41.78 64.26,44.32 64.26,57.66 v1(62.36,59.56)
  BOTTOM w0.381: v1(62.36,59.56) v1(47.12,74.8) ; v1(69.34,39.88) 68.71,39.88 68.07,39.24 68.07,30.99 66.8,29.72 51.56,29.72 49.66,27.81 40.77,27.81 v1(40.13,27.18)
MODE_20V: length 86
  TOP w0.381: U4.1 51.56,25.91 50.93,26.54 v1(50.93,27.18) ; J4.1 69.98,43.05 66.8,43.05 64.9,44.96 64.9,58.93 v1(62.99,60.83) ; v1(56.64,74.8) R32.1 ; v1(71.88,39.88) D6.2
  BOTTOM w0.381: v1(62.99,60.83) 56.64,67.18 v1(56.64,74.8) ; v1(50.93,27.18) 51.56,27.81 61.09,27.81 61.72,28.45 71.88,28.45 73.15,29.72 73.15,39.24 72.52,39.88 v1(71.88,39.88) 71.88,40.51 71.25,41.15 J4.1
MODE_200V: length 77.8
  TOP w0.381: v1(69.98,58.29) 69.98,56.39 67.44,53.85 J5.1 ; U6.2 67.07,74.17 67.56,74.66 R21.1 70.12,74.66 v1(71.25,73.53) ; U5.1 62.36,25.91 61.72,26.54 v1(61.72,27.18) ; v1(76.33,39.88) D7.2
  BOTTOM w0.381: v1(69.98,58.29) 70.61,58.29 72.52,60.2 72.52,72.26 v1(71.25,73.53) ; v1(61.72,27.18) 62.36,27.81 72.52,27.81 75.06,30.35 75.06,39.24 75.69,39.88 v1(76.33,39.88) 76.33,43.69 73.15,46.86 69.34,46.86 J5.1
OSC_120KHZ: length 52.4
  TOP w0.381: 18.92,28.59 U11.7 18.92,30.76 19.41,31.24 19.79,31.24 20.33,31.79 R42.2 22.73,32.51 29.08,38.86 38.61,38.86 41.41,41.67 41.41,44.91 47.12,50.61 U1.22 ; 18.92,28.59 18.4,28.07 15.98,28.07 15.84,28.21 R43.2 ; 18.92,28.59 19.44,28.07 23.14,28.07 23.28,28.21 R44.1
OVER_RNG: length 15.7
  TOP w0.381: U1.27 40.77,54.48 33.53,61.72 R52.1
POL: length 31.2
  TOP w0.381: U1.23 45.85,57.02 34.16,68.71 34.16,69.98 ; 34.16,69.98 34.8,70.61 36.07,70.61 36.7,71.25 R23.1 ; 34.16,69.98 33.53,70.61 31.62,70.61 30.99,71.25 R18.1
POWER_IN: length 20.7
  TOP w0.152: U8.3 28.56,9.89 ; U8.3 29.05,8.94 ; U8.3 28.08,8.94 ; U8.3 28.56,7.99 ; 27.13,10.15 C12.1 26.54,9.59
  TOP w0.381: 20.96,5.84 21.72,5.84 22.73,6.86 J10.2 ; 20.96,5.84 19.94,4.83 TP2.1 ; 20.96,5.84 20.83,5.97 D3.2
  TOP w0.635: C12.1 23.86,10.15 J10.2
SS_A: length 90.7
  TOP w0.381: v1(48.39,106.55) 48.39,105.25 47.98,104.85 DS2.7 ; v1(57.28,106.55) 57.28,105.25 56.87,104.85 DS3.7 ; R33.2 v1(13.46,84.2) ; DS4.7 65.76,104.85 66.17,105.25 v1(66.17,106.55) ; v1(75.06,106.55) 75.06,105.25 74.65,104.85 DS5.7
  BOTTOM w0.381: v1(13.46,84.2) 13.46,86.87 28.7,102.11 31.49,102.11 33.58,104.2 33.58,105.72 34.42,106.55 v1(48.39,106.55) v1(57.28,106.55) v1(66.17,106.55) v1(75.06,106.55)
SS_B: length 88.7
  TOP w0.381: v1(66.8,99.57) 67.26,100.03 DS4.6 ; DS5.6 76.15,100.03 v1(75.69,99.57) ; v1(49.02,99.57) 49.48,100.03 DS2.6 ; R34.2 v1(16,84.2) ; v1(57.91,99.57) 58.37,100.03 DS3.6
  BOTTOM w0.381: v1(16,84.2) 16,86.87 28.7,99.57 38.23,99.57 ; DS1.6 40.13,101.47 38.23,99.57 ; 38.23,99.57 v1(49.02,99.57) v1(57.91,99.57) v1(66.8,99.57) v1(75.69,99.57)
SS_C: length 86.1
  TOP w0.381: DS2.4 47.98,94.26 47.75,94.49 v1(47.75,95.12) ; v1(65.53,95.12) 65.53,94.49 65.76,94.26 DS4.4 ; DS5.4 74.65,94.26 74.42,94.49 v1(74.42,95.12) ; v1(56.64,95.12) 56.64,94.49 56.87,94.26 DS3.4 ; R36.2 v1(18.54,84.2)
  BOTTOM w0.381: v1(18.54,84.2) 18.54,86.87 26.8,95.12 35.05,95.12 ; 35.05,95.12 v1(47.75,95.12) v1(56.64,95.12) v1(65.53,95.12) v1(74.42,95.12) ; 35.05,95.12 37.59,92.58 DS1.4
SS_D: length 80.5
  TOP w0.381: 42.16,95.76 26.16,95.76 21.08,90.68 R37.2 ; 42.16,95.76 51.18,95.76 ; 42.16,95.76 44.98,92.94 DS2.2 ; 51.18,95.76 60.35,95.76 60.4,95.71 ; 51.18,95.76 53.87,93.07 DS3.2 ; 60.4,95.71 62.76,93.35 DS4.2 ; 60.4,95.71 60.45,95.76 69.24,95.76 71.65,93.35 DS5.2
SS_DP3: length 7.5
  TOP w0.381: DS3.5 58.37,89.21 58.55,89.04 v1(58.55,88.14) ; R16.1 v1(58.55,85.6)
  BOTTOM w0.381: v1(58.55,85.6) v1(58.55,88.14)
SS_DP4: length 7.5
  TOP w0.381: v1(49.66,88.14) 49.66,89.04 49.48,89.21 DS2.5 ; R27.1 v1(49.66,85.6)
  BOTTOM w0.381: v1(49.66,85.6) v1(49.66,88.14)
SS_DP5: length 5.6
  TOP w0.381: R24.1 DS1.5
SS_E: length 76
  TOP w0.381: R38.2 23.62,90.68 26.8,93.85 42.8,93.85 43.48,93.17 DS2.1 43.48,88.6 45.21,86.87 50.29,86.87 ; DS4.1 61.26,88.83 59.3,86.87 ; 50.29,86.87 59.3,86.87 ; 50.29,86.87 52.37,88.95 DS3.1 ; 59.3,86.87 69.47,86.87 70.15,87.55 DS5.1
SS_F: length 87.4
  TOP w0.381: DS4.9 62.76,100.71 60.35,98.3 ; 42.57,98.3 44.98,100.71 DS2.9 ; 42.57,98.3 51.46,98.3 ; 42.57,98.3 25.53,98.3 10.92,83.69 R28.2 ; 60.35,98.3 69.24,98.3 71.65,100.71 DS5.9 ; 60.35,98.3 51.46,98.3 ; 51.46,98.3 53.87,100.71 DS3.9
SS_G: length 102.2
  TOP w0.152: 57.91,110.36 52.83,110.36 ; 49.02,110.36 43.94,110.36 ; 66.8,110.36 61.72,110.36
  TOP w0.381: DS3.10 52.37,104.85 52.2,105.02 52.2,109.09 50.93,110.36 ; 50.93,110.36 49.02,110.36 ; 50.93,110.36 52.83,110.36 ; 61.72,110.36 59.82,110.36 ; 59.82,110.36 61.09,109.09 61.09,105.02 61.26,104.85 DS4.10 ; 59.82,110.36 57.91,110.36 ; 43.94,110.36 43.48,109.9 DS2.10 43.31,102.6 43.31,100.58 42.93,100.2 25.32,100.2 8.38,83.26 R30.2 ; 66.8,110.36 68.71,110.36 69.98,109.09 69.98,105.02 70.15,104.85 DS5.10
SS_NEG: length 11.7
  TOP w0.381: R25.2 37.34,85.22 36.7,85.85 30.99,85.85 29.97,86.87 DS1.1
SS_POS: length 72.3
  TOP w0.381: R15.2 29.08,83.31 27.81,82.04 27.81,76.33 26.54,75.06 11.05,75.06 9.93,76.17 9.93,77.7 8.76,78.87 8.13,78.87 6.22,80.77 6.22,83.31 25.91,103 30.86,103 DS1.9
V_NEG: length 70.9
  TOP w0.381: 49.66,36.56 C6.2 ; C6.2 49.52,37.43 49.66,37.57 U1.9 ; C6.2 49.52,35.98 49.66,35.84 v1(49.66,34.8) ; J7.1 60.45,13.84 61.85,15.24 72.24,15.24 75.83,18.83 R8.2 75.83,27.67 73.79,29.72 58.55,29.72 v1(54.1,34.16)
  BOTTOM w0.381: v1(49.66,34.8) 50.29,34.16 v1(54.1,34.16)
V_POS: length 9.6
  TOP w0.381: R5.2 52.2,36.27 51.77,36.7 C6.1 51.07,37.43 50.93,37.57 U1.10
V_REF_1V2: length 42.1
  TOP w0.381: 19.56,42.47 19.13,42.04 R39.2 ; 19.56,42.47 19.63,42.4 20.46,42.4 21.2,41.67 C15.1 21.2,39.71 21.32,39.59 R40.2 21.32,38.14 21.87,37.59 24,37.59 27.81,41.4 40.18,41.4 40.77,41.99 U1.2 ; 19.56,42.47 19.56,45.96 18.91,46.61 13.59,46.61 13.08,46.1 TP5.1
N00563: length 2.8
  TOP w0.381: U9.2 28.45,43.98 28.94,43.48 C11.1
N00567: length 2.8
  TOP w0.381: U9.4 30.99,43.89 30.49,43.4 C11.2
N01528: length 10.6
  TOP w0.381: R43.1 15.11,25.96 15.25,25.82 R41.2 15.25,22.96 16.36,21.86 R45.1 18.29,22.56 18.92,23.19 U11.2
N01588: length 10.5
  TOP w0.381: U11.3 20.19,23.62 ; 20.19,23.62 C18.1 ; 20.19,23.62 20.83,22.99 23.37,22.99 24,23.62 R44.2
N03523: length 14.6
  TOP w0.381: 49.66,19.56 50.29,20.19 50.29,22.73 49.66,23.37 U3.3 ; 49.66,19.56 R6.1 ; 49.66,19.56 R4.2
N03533: length 14.6
  TOP w0.381: 60.45,19.56 61.09,20.19 61.09,22.73 60.45,23.37 U4.3 ; 60.45,19.56 R6.2 ; 60.45,19.56 R7.1
N03577: length 12
  TOP w0.381: 71.25,19.56 R7.2 ; 71.25,19.56 71.88,20.19 71.88,22.73 71.25,23.37 U5.3 ; 71.25,19.56 R8.1
N04032: length 36.1
  TOP w0.152: U2.4 37.86,26.31 ; U2.4 38.65,25.91 ; U2.4 37.86,25.5 ; U2.4 37.07,25.91 ; 59.45,25.5 U4.4 ; U4.4 59.45,26.31 ; U4.4 58.66,25.91 ; U4.4 60.24,25.91 ; 70.24,25.5 U5.4 ; U5.4 69.46,25.91 ; U5.4 70.24,26.31 ; U3.4 48.65,26.31 ; U3.4 48.65,25.5 ; U3.4 47.87,25.91 ; U3.4 49.44,25.91
  TOP w0.381: U5.4 71.25,25.91 71.88,26.54 71.88,27.81 71.25,28.45 53.47,28.45 52.2,29.72 R5.1
N07546: length 3
  TOP w0.381: D1.2 35.48,34.8 35.05,34.37 R2.1
N07705: length 5.7
  TOP w0.381: U1.4 43.31,41.78 41.4,39.88 C2.2
N07717: length 5.4
  TOP w0.381: C3.2 43.31,39.88 44.58,41.15 U1.5
N07775: length 13.3
  TOP w0.381: 40.77,34.8 41.4,35.43 C2.1 ; 40.77,34.8 D1.1 ; 40.77,34.8 42.67,34.8 ; 42.67,34.8 44.58,34.8 45.21,35.43 R1.1 ; 42.67,34.8 43.31,35.43 C3.1
N08029: length 5.1
  TOP w0.381: U1.6 45.85,41.15 45.21,40.51 R1.2
N08054: length 3.2
  TOP w0.381: U1.7 47.12,41.38 46.98,41.24 C4.2
N08061: length 3.2
  TOP w0.381: C4.1 48.53,41.24 48.39,41.38 U1.8
N14805: length 59.3
  TOP w0.381: DS3.3 v1(55.37,93.85) ; R14.1 DS5.3 v1(73.15,93.85) ; DS2.3 v1(46.48,93.85) ; DS4.3 v1(64.26,93.85)
  BOTTOM w0.381: v1(73.15,93.85) v1(64.26,93.85) v1(55.37,93.85) v1(46.48,93.85) 43.06,93.85 38.86,89.66 38.86,88.77 38.23,88.14 36.32,88.14 DS1.3
N18989: length 10.9
  TOP w0.381: U7.3 10.92,64.33 10.67,64.07 J9.1 13.26,62.99 13.75,62.5 R26.2
N19111: length 45.3
  TOP w0.381: Q7.2 16.07,95.06 4.95,83.95 4.95,80.77 6.86,78.87 6.86,76.33 8.76,74.42 11.3,74.42 U7.5
N19152: length 5.5
  TOP w0.381: v1(10.92,79.88) R28.1
  BOTTOM w0.381: 8.38,77.34 8.38,77.98 9.02,78.61 10.29,78.61 10.92,79.25 v1(10.92,79.88)
N19173: length 5.5
  TOP w0.381: U7.14 10.92,78.61 10.03,79.5 8.76,79.5 8.38,79.88 R30.1
N19179: length 3.7
  TOP w0.381: 13.46,77.34 R33.1
N19194: length 3.7
  TOP w0.381: 16,77.34 R34.1
N19209: length 3.7
  TOP w0.381: U7.11 R36.1
N19228: length 3.7
  TOP w0.381: U7.10 R37.1
N19243: length 3.7
  TOP w0.381: 23.62,77.34 R38.1
N19743: length 4.7
  TOP w0.381: Q1.3 DS1.8
N19818: length 6.6
  TOP w0.381: Q2.3 DS2.8
N19836: length 6.6
  TOP w0.381: Q3.3 DS3.8
N19853: length 6.6
  TOP w0.381: Q4.3 DS4.8
N19889: length 6.6
  TOP w0.381: Q5.3 DS5.8
N20631: length 5.4
  TOP w0.381: 66.17,80.44 66.17,81.17 66.16,81.17 66.16,81.6 65.66,82.11 Q8.1 ; 66.17,80.44 R19.2 ; 66.17,80.44 66.88,81.15 R22.1
N21108: length 4.9
  TOP w0.381: R29.2 47.12,79.02 46.98,79.16 R31.1 46.98,81.1 45.97,82.11 Q10.1
N21509: length 4.9
  TOP w0.381: R32.2 56.64,79.02 56.5,79.16 R35.1 56.5,81.1 55.5,82.11 Q11.1
N23587: length 3.5
  TOP w0.381: R18.2 30.99,75.92 30.67,76.24 Q6.1
N23591: length 3.5
  TOP w0.381: Q9.1 36.39,76.24 36.7,75.92 R23.2
N23726: length 5.7
  TOP w0.381: Q9.2 38.29,80.45 37.34,81.41 R25.1
N23733: length 6.1
  TOP w0.381: Q6.2 32.58,82.41 32.4,82.59 R15.1
N24793: length 1.9
  TOP w0.381: R47.1 14.73,4.78 14.8,4.84 D3.1
N24801: length 2.2
  TOP w0.381: R48.1 D4.1
N24805: length 2.2
  TOP w0.381: R49.1 D5.1
N24809: length 2.2
  TOP w0.381: R50.1 D6.1
N24813: length 2.2
  TOP w0.381: R51.1 D7.1
N25196: length 19.6
  TOP w0.508: 10.16,13.87 6.51,17.53 6.51,17.56 J8.1
  TOP w0.635: 10.16,13.87 15.34,13.87 J10.1
N37644: length 4
  TOP w0.381: R17.2 16.24,106.31 16.76,105.79 17.55,105.79 17.97,105.37 Q7.1
N38125: length 2.7
  TOP w0.381: Q5.1 74.1,111.76 74.61,112.26 75.04,112.26 75.04,112.27 R13.2
N38143: length 2.7
  TOP w0.381: R12.2 66.15,112.27 66.15,112.26 65.72,112.26 65.21,111.76 Q4.1
N38147: length 2.7
  TOP w0.381: R11.2 57.26,112.27 57.26,112.26 56.83,112.26 56.32,111.76 Q3.1
N38167: length 2.7
  TOP w0.381: R10.2 48.37,112.27 48.37,112.26 47.94,112.26 47.43,111.76 Q2.1
N38171: length 2.7
  TOP w0.381: R9.2 36.94,112.27 36.94,112.26 36.51,112.26 36,111.76 Q1.1
N38464: length 6.1
  TOP w0.381: Q10.2 42.99,84.01 41.26,82.28 R24.2
N38604: length 6.1
  TOP w0.381: R27.2 50.79,82.28 52.51,84.01 Q11.2
N40574: length 7.4
  TOP w0.381: R16.2 59.27,82.28 61,84.01 Q8.2
N40763: length 4
  TOP w0.381: R19.1 66.17,77.05 64.24,75.12 U6.4
N40918: length 4.4
  TOP w0.381: R52.2 25.02,61.72 24.96,61.79 Q12.1
N40926: length 2.7
  TOP w0.381: R46.2 22.19,59.32 22.75,59.88 Q12.2
N40930: length 2.2
  TOP w0.381: R46.1 D2.1
N2730560:
  vias: v1(1.65,115.32) v1(1.65,112.14) v1(1.65,107.7) v1(4.83,115.32) v1(4.83,108.97) v1(8,112.14) v1(8.64,115.32) v1(8.64,107.7)
N2730572:
  vias: v1(1.65,9.91) v1(1.65,4.83) v1(1.65,1.65) v1(4.83,8) v1(4.83,1.65) v1(8,9.91) v1(8,4.83) v1(8,1.65)
N2730576:
  vias: v1(75.95,9.91) v1(75.95,4.83) v1(75.95,1.65) v1(79.12,8) v1(79.12,1.65) v1(82.3,9.91) v1(82.3,4.83) v1(82.3,1.65)
N2730580:
  vias: v1(75.95,61.98) v1(76.58,64.52) v1(77.85,56.9) v1(79.12,65.15) v1(79.12,58.8) v1(82.3,65.15) v1(82.3,61.98) v1(82.3,56.9)

## Copper pours and planes (outline as drawn; the poured copper is in the pictures)
5V+ on TOP: 19.81,54.86 19.81,51.44 20.19,51.05 22.48,51.05 24,49.53 25.53,49.53 27.43,47.62 28.96,47.62 28.96,54.86
5V+ on TOP: 7.24,78.49 7.24,75.06 5.71,75.06 4.57,76.2 4.57,77.72 2.67,77.72 2.67,79.63 4.95,79.63 6.1,78.49
5V+ on TOP: 19.43,35.43 19.43,32 18.29,30.86 18.29,28.57 16.38,28.57 16.38,35.43
5V+ on TOP: 51.44,48.01 52.96,48.01 52.96,41.91 53.34,41.53 56.01,41.53 56.01,39.62 51.44,39.62
5V+ on TOP: 31.62,6.1 29.72,6.1 29.72,16.38 31.62,16.38
5V+ on TOP: 64.77,74.3 64.77,72.01 59.44,72.01 59.44,75.44 62.1,75.44 62.48,75.06 62.48,74.68 62.87,74.3
5V+ on TOP, BOTTOM: 25.27,112.52 25.27,108.08 76.07,108.08 76.07,112.52
5V+ on BOTTOM: 66.55,93.47 66.55,87.12 77.34,87.12 77.34,93.47
GND on TOP, BOTTOM: 0.38,116.46 0.38,0.38 83.57,0.38 83.57,116.46
COMMON_CATHODE on TOP: 29.97,24 29.97,22.73 64.9,22.73 64.9,24
POWER_IN on TOP: 24,12.57 28.96,12.57 29.34,12.19 29.34,6.1 24,6.1
N04032 on TOP: 36.96,26.54 36.96,24.64 71.25,24.64 71.25,26.54 69.34,26.54 69.34,25.27 60.45,25.27 60.45,26.54 58.55,26.54 58.55,25.27 49.66,25.27 49.66,26.54 47.75,26.54 47.75,25.27 38.86,25.27 38.86,26.54
N2730560 on TOP, BOTTOM: 1.02,115.95 9.27,115.95 9.27,107.06 1.02,107.06
N2730572 on TOP: 1.02,1.02 8.64,1.02 8.64,10.54 1.02,10.54
N2730572 on BOTTOM: 1.02,10.54 8.64,10.54 8.64,1.02 1.02,1.02
N2730576 on TOP: 75.31,1.02 82.93,1.02 82.93,10.54 75.31,10.54
N2730576 on BOTTOM: 75.31,10.54 82.93,10.54 82.93,1.02 75.31,1.02
N2730580 on TOP: 82.93,65.79 82.93,56.26 77.85,56.26 75.31,58.8 75.31,63.88 77.22,65.79
N2730580 on BOTTOM: 77.22,65.79 82.93,65.79 82.93,56.26 77.85,56.26 75.31,58.8 75.31,63.88

## Text on the board
Ref Des/Silkscreen Bottom: "Volt Better" | Digital Voltmeter | Nosherwan Ahmed | 2019/04/18
Ref Des/Silkscreen Top: 200V | 20V | 2V | 0V2 | GND | DIGITAL VOLTMETER | POWER | 5V- | +ve | Input | -ve | 5V+ | + | V_REF
